# Altium PCB VNA_CHANNEL2.PcbDoc (part 3 of 3)
Units mm, origin at the board's own origin, x right, y up, seen from the top; angles counter-clockwise.
Board outline 32.68 x 75 mm, 4 copper layers (Top Layer, GND, PWR, Bottom Layer), stack 0.758 mm thick; 209 components, 187 nets, 832 pads, 833 vias.
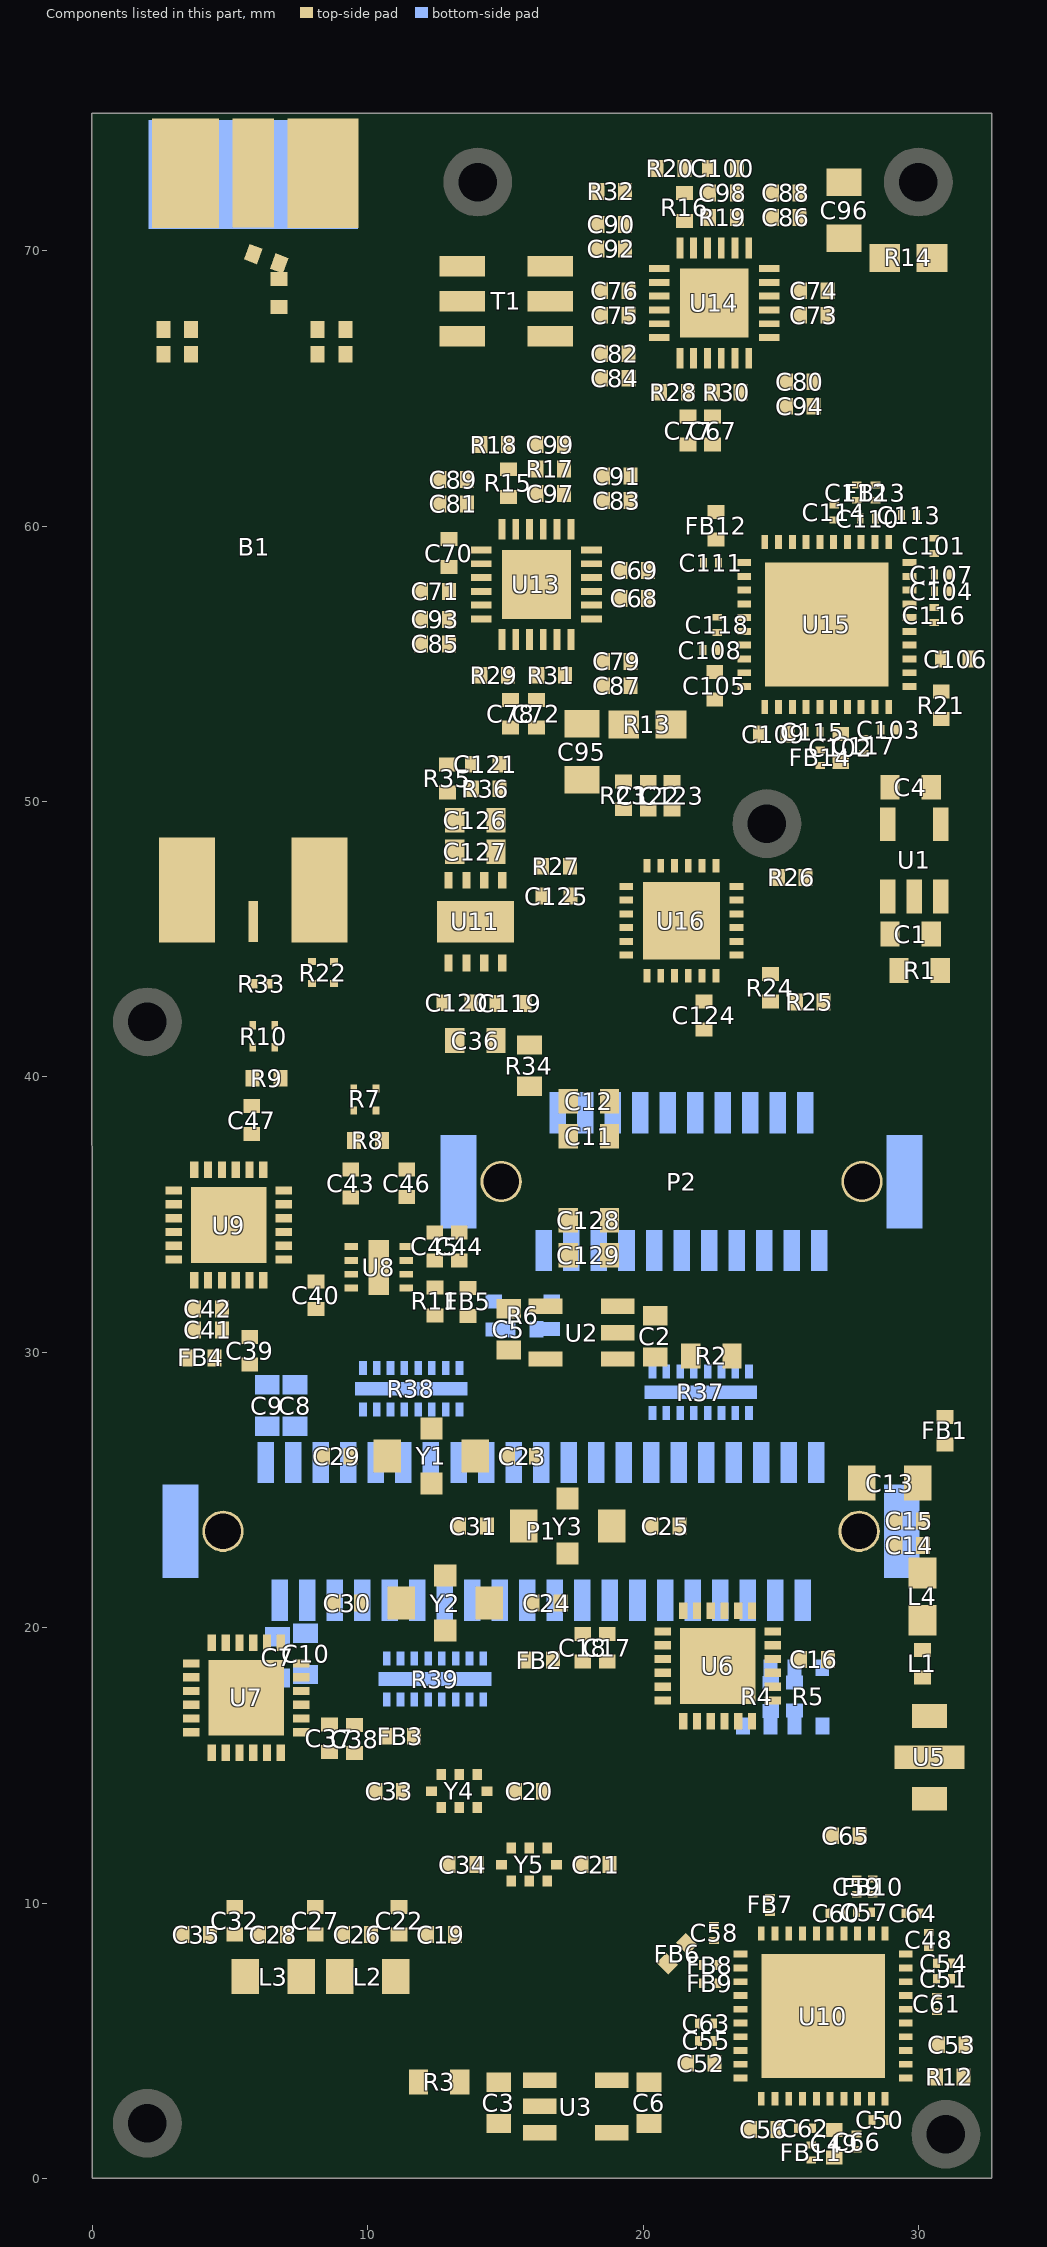
[diagram p5: the components of this part, seen from the top]

## Keep-outs
Keep-Out Layer:
  lines w0.254: -0.025,74.999 0,0 32.659,0 32.659,74.999 -0.009,74.999

## Other copper
Bottom Layer:
  pour cut-out: 3.4,68.2 8.4,68.2 8.4,65.446 3.4,65.446
PWR (plane layer: these items are gaps in the copper):
  lines w0.33: -0.012,35.382 18.491,35.382 18.491,18.517 15.799,18.517 ; -0.01,29.007 14.859,29.007 14.859,18.517 16.027,18.517 ; 5.283,29.007 5.258,29.007 5.258,14.91 26.238,14.91 26.619,14.91 26.619,31.242 ; 9.085,48.858 9.144,48.858 ; 11.811,51.587 18.923,51.587 18.923,63.627 18.466,63.627 ; 11.811,63.627 18.466,63.627 ; 11.811,75.032 11.811,40.234 26.619,40.234 26.619,31.242 ; 18.466,74.999 18.466,63.627 ; 18.491,31.242 26.619,31.242 ; 19.659,0.101 19.659,10.643 32.628,10.643 ; 26.619,26.187 32.636,26.187 32.636,26.213 ; 27.432,74.999 27.432,63.627 27.381,63.627 18.694,63.627 18.466,63.627 ; 32.512,47.727 27.559,47.727 22.225,53.061 22.225,61.316 31.891,61.316 32.779,61.316

## Silkscreen, mask and mechanical layers (free items; w line width, h text height)
Bottom Solder:
  rectangle: -0.009,62.4 11.8,74.999
  rectangle: 24.7,3.8 27.7,7.2
  rectangle: 27.5,10.9 31.3,20.8
  rectangle: 12.7,43.9 17.6,47.6
  rectangle: 19,43.1 23,47.2
  rectangle: 20.2,65.9 26.1,70.7
  rectangle: 13.6,55 19.8,60.8
  rectangle: 23.8,54 28.5,59.1